# EAGLE board untitled (EAGLE 7.2.0)
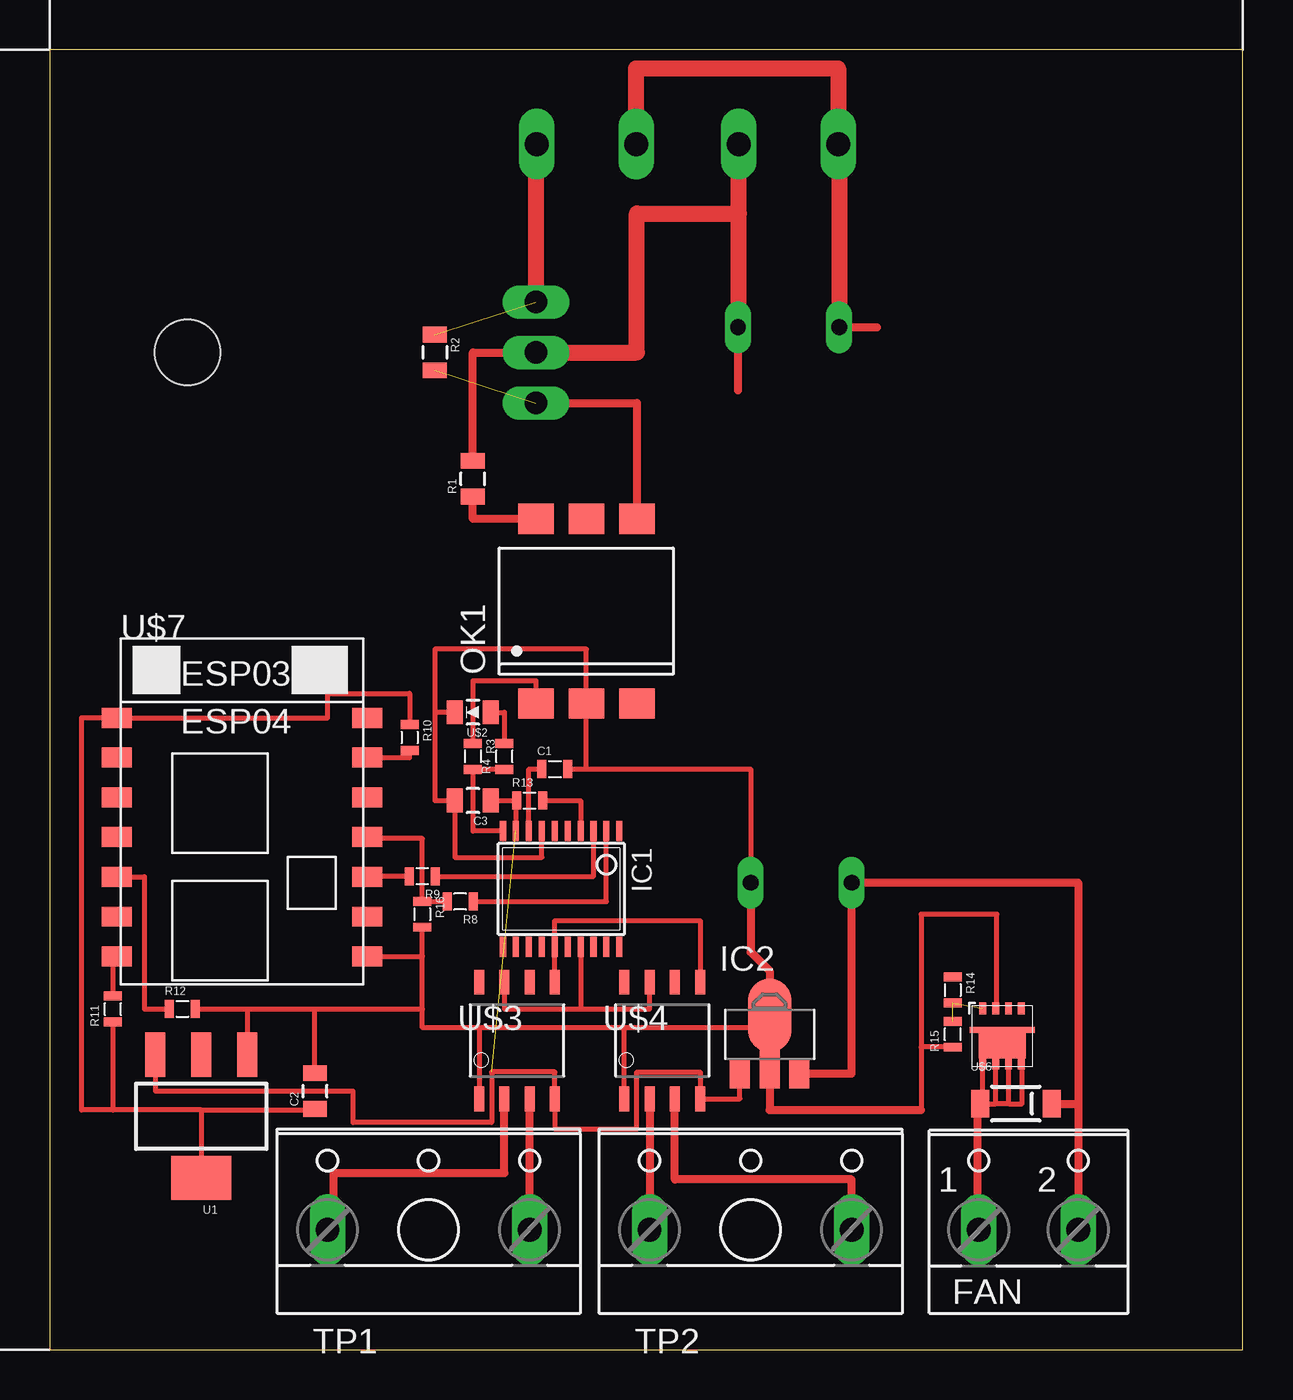
[diagram p0: board, top side]
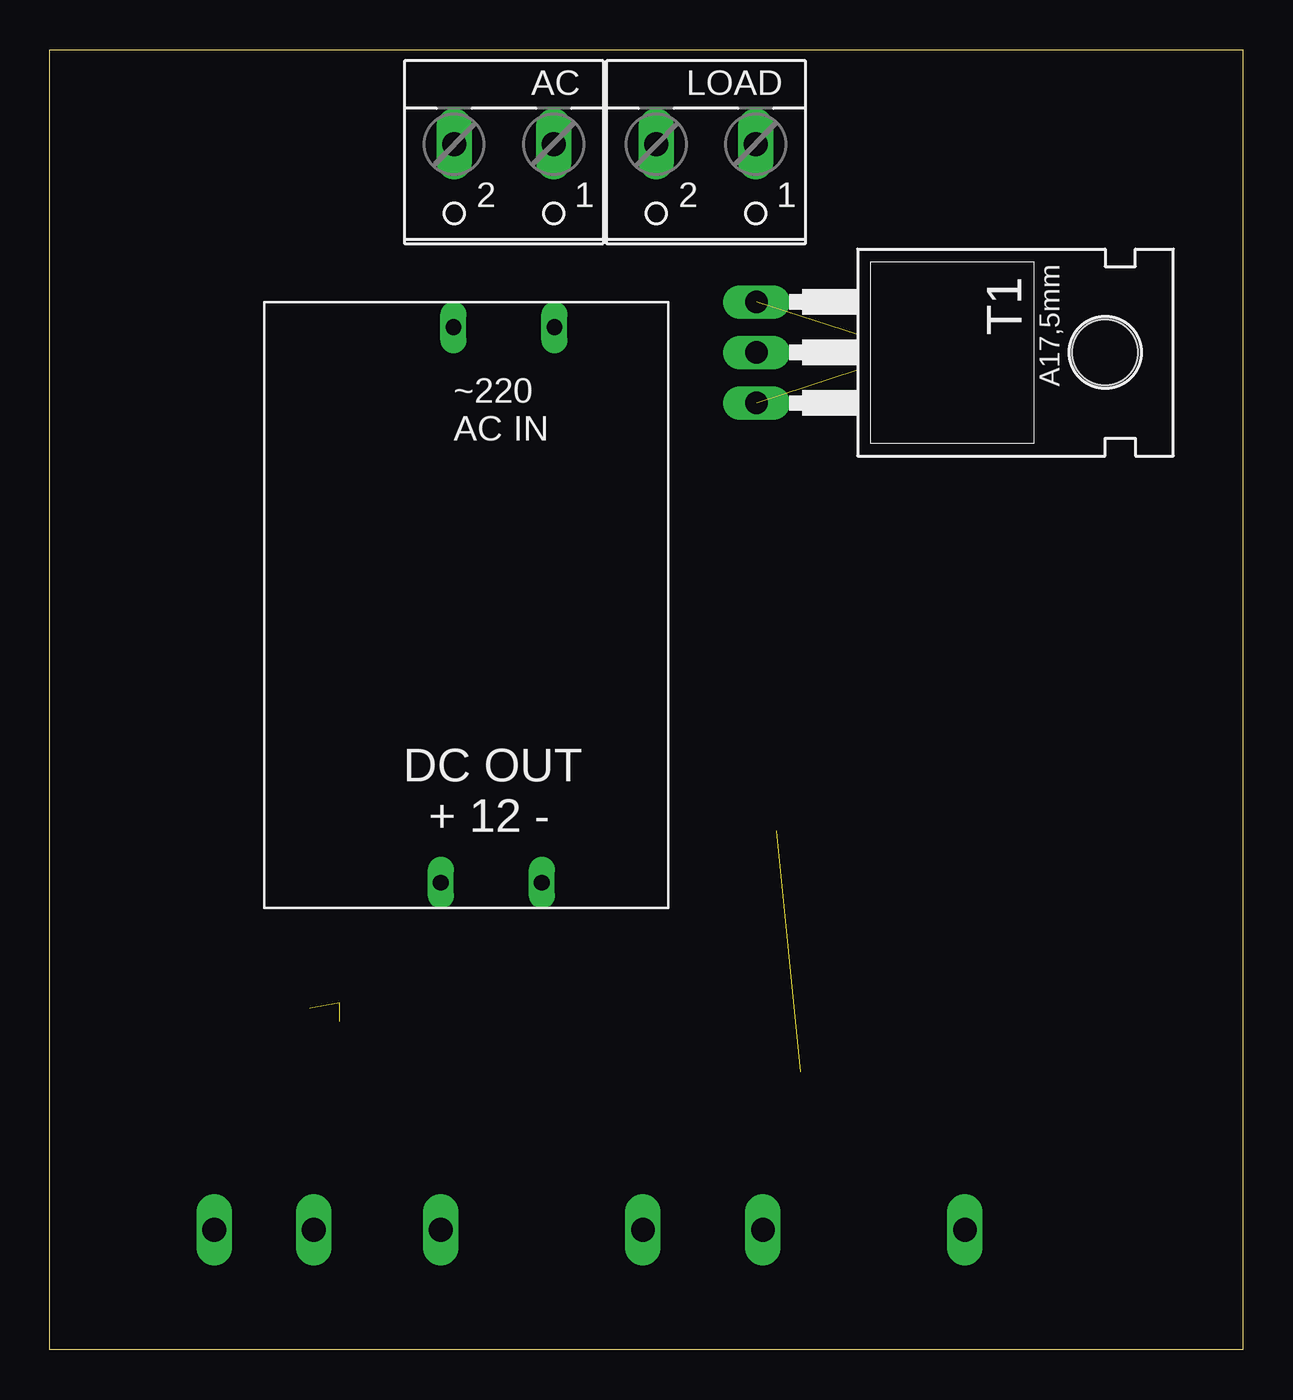
[diagram p1: board, bottom side, seen from below]

Size 59.99 x 65.39 mm. Coordinates in mm from the lower left corner, seen from the top.
Outline: 0,0 59.99,0 59.99,65.39 0,65.39 0,0
Copper layers (1*16): Top 0.035mm / dielectric 1.5mm / Bottom 0.035mm
Design rules "default": minimum track width 0.2mm, minimum drill 0.2mm, track to track 0.2mm, track to pad 0.2mm, pad to pad 0.2mm, via to via 0.2mm, smd to smd 0.2mm, copper to edge 0.2mm, drill to drill 0.2mm, minimum pad ring 10mil, minimum via ring 8mil, stop-mask expansion 4mil, vias tented up to drill 0mil, thermal gap 10mil

## Footprints (pad centres in the part's own frame; a part is rotated, then mirrored left to right if it is on the bottom)
W237-102 = drill 1.194 long: 1 -2.5,-1.27; 2 2.5,-1.27
C0603 = smd 0.45 x 0.9: 1 -0.65,0; 2 0.65,0
C0805 = smd 0.8 x 1.2: 1 -0.9,0; 2 0.9,0
TSSOP20 = smd 0.305 x 0.991: 1 -2.925,-2.918; 2 -2.275,-2.918; 3 -1.625,-2.918; 4 -0.975,-2.918; 5 -0.325,-2.918; 6 0.325,-2.918; 7 0.975,-2.918; 8 1.625,-2.918; 9 2.275,-2.918; 10 2.925,-2.918; 11 2.925,2.918; 12 2.275,2.918; 13 1.625,2.918; 14 0.975,2.918; 15 0.325,2.918; 16 -0.325,2.918; 17 -0.975,2.918; 18 -1.625,2.918; 19 -2.275,2.918; 20 -2.925,2.918
SOT89 = smd 1 x 1.5: 1 -1.499,-1.981; 3 1.499,-1.981 | smd 1 x 2: 2 0,-1.727 | smd 2.2 x 3.7: 2@1 0,0.94
DIL6-SMD = smd 1.78 x 1.52: 1 -2.54,-4.645; 2 0,-4.645; 3 2.54,-4.645; 4 2.54,4.645; 5 0,4.645; 6 -2.54,4.645
R0805 = smd 0.8 x 1.2: 1 -0.9,0; 2 0.9,0
0603 = smd 0.45 x 0.9: 1 -0.65,0; 2 0.65,0
TO220BH = drill 1.118 long: G 2.54,-6.35; T1 -2.54,-6.35; T2 0,-6.35 | hole 3.302: 0,11.176
W237-2N = drill 1.194 long: 1 -5.08,-0.635; 2 5.08,-0.635
SOT223 = smd 1 x 2.235: 1 -2.311,-3.099; 2 0,-3.099; 3 2.311,-3.099 | smd 3 x 2.2: 4 0,3.099
0805-LED = smd 0.8 x 1.2: A -0.9,0; C 0.9,0
SO08 = smd 0.5 x 1.25: 1 -1.905,-2.934; 2 -0.635,-2.934; 3 0.635,-2.934; 4 1.905,-2.934; 5 1.905,2.934; 6 0.635,2.934; 7 -0.635,2.934; 8 -1.905,2.934
DFN3X3 = smd 1.6 x 2.375: D -0.425,0.05 | smd 0.3 x 0.8: D:1 0.225,1.275; D:2 0.225,-1.175 | smd 0.6 x 0.35: D:3 -1.461,-0.916; D:4 -1.461,-0.266; D:5 -1.461,0.384; D:6 -1.461,1.034; G 1.289,1.034; S:1 1.289,0.384; S:2 1.289,-0.266; S:3 1.289,-0.916
SOD80C = smd 0.9 x 1.4: A -1.8,0; C 1.8,0
ESP-03 = smd 1.5 x 1: ANT 7.4,4.8; CH_PD 7.4,2.8; GND 7.4,-7.2; GPIO0 -5.2,-7.2; GPIO2 -5.2,-5.2; GPIO12 -5.2,0.8; GPIO13 -5.2,-1.2; GPIO14 -5.2,2.8; GPIO15 -5.2,-3.2; GPIO18 7.4,0.8; NC 7.4,-5.2; URXD 7.4,-1.2; UTXD 7.4,-3.2; VCC -5.2,4.8
ACDC12(1) = drill 0.8 long: +12 8.89,1.27; GND 13.97,1.27; N 9.525,29.21; P 14.605,29.21

## Placement (x,y rotation side)
AC  [W237-102]  37.15,59.37 180 bottom
C1  [C0603]  25.4,29.21 0 top
C2  [C0805]  13.34,13.02 90 top
C3  [C0805]  21.27,27.62 180 top
FAN  [W237-102]  49.21,7.3 0 top
IC1  STM8S003F3  [TSSOP20]  25.72,23.18 180 top
IC2  78L05F  [SOT89]  36.2,15.88 0 top
LOAD  [W237-102]  26.99,59.37 180 bottom
OK1  MOC3043S  [DIL6-SMD]  26.99,37.15 0 top
R1  360  [R0805]  21.27,43.81 90 top
R2  360  [R0805]  19.37,50.16 270 top
R3  1k  [0603]  21.27,29.84 270 top
R4  1k  [0603]  22.86,29.84 90 top
R8  [0603]  20.64,22.54 180 top
R9  [0603]  18.73,23.81 180 top
R10  [0603]  18.1,30.8 270 top
R11  [0603]  3.17,17.14 90 top
R12  [0603]  6.67,17.14 0 top
R13  [0603]  24.13,27.62 0 top
R14  [0603]  45.4,18.1 270 top
R15  [0603]  45.4,15.88 90 top
R16  [0603]  18.73,21.91 270 top
T1  BT138-H  [TO220BH]  18.1,50.16 270 bottom
TP1  [W237-2N]  19.05,6.67 0 top
TP2  [W237-2N]  35.24,6.67 0 top
U1  [SOT223]  7.62,11.75 180 top
U$2  LED0805  [0805-LED]  21.27,32.07 180 top
U$3  MAX6675  [SO08]  23.5,15.56 0 top
U$4  MAX6675  [SO08]  30.8,15.56 0 top
U$5  AON7200  [DFN3X3]  47.94,15.88 90 top
U$6  PMLL4150  [SOD80C]  48.58,12.38 0 top
U$7  ESP8266  [ESP-03]  8.57,26.99 0 top
U$8  AC-DC  [ACDC12(1)]  49.21,22.23 0 bottom

## Library data of the parts
AC FAN LOAD = con-wago-500; MPN: 237-102; OC_FARNELL: unknown; OC_NEWARK: 70K9898
C1-C3 IC1 R1-R4 R8-R16 U$2-U$5 U$7 U$8 = CasaLibrary
IC2 = linear
OK1 = optocoupler; MF: FAIRCHILD SEMICONDUCTOR; MPN: MOC3043SM; OC_FARNELL: 1505441; OC_NEWARK: 78K6091
T1 = triac
TP1 TP2 = con-wago-508; OC_FARNELL: unknown; OC_NEWARK: unknown
U1 = CasaLibrary; PROD_ID: VREG-08170
U$6 = DIODE

## Nets
12V: FAN.2 IC2.3 U$6.C U$8.+12
+3V3: C2.1 R10.1 R11.1 U1.4 U$7.VCC
+5V: C3.1 IC1.9 IC2.1 R13.1 U1.3 U$3.4 U$4.4
DIMM_IN: IC1.10 R3.2 R4.1
ESP8266_!RST: R10.2 U$7.CH_PD
ESP8266_FLASH: R11.2 U$7.GPIO0
ESP8266_RX: IC1.2 R8.1
ESP8266_TX: IC1.3 R9.1
FAN_PWM: R14.1
GND: C1.2 C2.2 C3.2 IC1.7 IC2.2 IC2.2@1 OK1.2 R12.2 R15.1 R16.2 U1.1 U$2.C U$3.1 U$4.1 U$5.S:1 U$5.S:2 U$5.S:3 U$7.GND U$8.GND
MAX7765(1)_!CS: U$3.6
MAX7765(2)_!CS: U$4.6
MAX7765_CLK: IC1.15 U$3.5 U$4.5
MAX7765_OUT: IC1.17 U$3.7 U$4.7
N$1: TP1.2 U$3.3
N$2: OK1.1 R3.1
N$3: R4.2 U$2.A
N$7: OK1.4 R2.2 T1.G
N$8: OK1.6 R1.1
N$9: AC.1 R1.2 T1.T2 U$8.P
N$10: TP1.1 U$3.2
N$11: AC.2 LOAD.2 U$8.N
N$12: LOAD.1 R2.1 T1.T1
N$14: TP2.2 U$4.3
N$15: TP2.1 U$4.2
N$16: R14.2 R15.2 U$5.G
N$17: U$7.GPIO2
N$18: R8.2 R16.1 U$7.URXD
N$19: R9.2 U$7.UTXD
N$20: R12.1 U$7.GPIO15
N$21: U$7.GPIO13
N$22: U$7.GPIO12
N$23: U$7.GPIO14
N$24: U$7.NC
N$25: U$7.GPIO18
N$26: FAN.1 U$5.D U$5.D:1 U$5.D:2 U$5.D:3 U$5.D:4 U$5.D:5 U$5.D:6 U$6.A
N$27: U$7.ANT
N$28: C1.1 IC1.8
STM8_!RST: IC1.4 R13.2
STM8_SWIM: IC1.18

## Tracks (layer width: path | path; a pad name or v marks a point on that pad's centre or on a via)
12V
  Top 0.406: U$6.C 51.71,12.38 | 51.71,12.38 FAN.2 | IC2.3 40.32,13.89 U$8.+12 51.71,23.5 51.71,12.38
+3V3
  Top 0.254: R10.1 18.1,33.02 13.97,33.02 13.97,31.79 U$7.VCC 1.59,31.79 1.59,12.06 3.17,12.06 | R11.1 3.17,12.06 | 7.62,12.06 U1.4 | 7.62,12.06 3.17,12.06 | 7.62,12.06 13.34,12.06 C2.1
+5V  (1 unrouted)
  Top 0.254: IC2.1 34.7,12.62 U$4.4 32.7,13.97 29.53,13.97 29.53,11.11 25.4,11.11 U$3.4 25.4,13.97 22.23,13.97 22.23,11.43 15.24,11.43 15.24,13.02 5.31,13.02 U1.3 | IC1.9 23.44,27.62 R13.1 C3.1
DIMM_IN
  Top 0.254: IC1.10 21.27,26.09 R3.2 R4.1
ESP8266_!RST
  Top 0.254: U$7.CH_PD 18.1,29.79 R10.2
ESP8266_FLASH
  Top 0.254: U$7.GPIO0 3.17,19.79 R11.2
ESP8266_RX
  Top 0.254: IC1.2 27.99,22.54 R8.1
ESP8266_TX
  Top 0.254: R9.1 27.34,23.81 IC1.3
GND
  Top 0.254: U$7.GND 18.73,19.79 | 18.73,19.79 R16.2 | U$4.1 28.89,16.19 | 28.89,16.19 21.59,16.19 | 21.59,16.19 U$3.1 | 35.88,16.19 28.89,16.19 | 9.93,17.14 13.34,17.14 | 13.34,17.14 18.73,17.14 | 18.73,17.14 18.73,19.79 | 21.59,16.19 18.73,16.19 18.73,17.14 | R15.1 43.81,15.22 | 43.81,15.22 43.81,12.06 | U$5.S:1 47.62,17.16 47.62,21.91 43.81,21.91 43.81,15.22 | 35.24,22.86 35.24,29.21 C1.2 26.99,29.21 OK1.2 26.99,35.24 19.37,35.24 19.37,32.07 | R12.2 9.93,17.14 | 9.93,17.14 U1.1 | C2.2 13.34,17.14 | IC1.7 24.74,24.77 20.37,24.77 C3.2 19.37,27.62 19.37,32.07 | U$2.C 19.37,32.07
  Top 0.406: U$8.GND 35.24,22.86 35.24,20 36.2,19.05 IC2.2@1 | IC2.2@1 36.2,16.51 35.88,16.19 35.88,16.5 IC2.2@1 | IC2.2@1 IC2.2 | 36.2,13.65 IC2.2 | IC2.2 36.2,12.06 43.81,12.06
MAX7765_CLK
  Top 0.254: IC1.15 U$3.5 25.4,21.59 32.7,21.59 U$4.5
MAX7765_OUT
  Top 0.254: U$3.7 22.86,17.14 26.69,17.14 | 26.69,17.14 30.16,17.14 U$4.7 | IC1.17 26.69,17.14
N$1
  Top 0.406: TP1.2 U$3.3
N$2
  Top 0.254: R3.1 21.27,33.66 24.45,33.66 OK1.1
N$3
  Top 0.254: U$2.A 22.86,32.07 R4.2
N$7  (1 unrouted)
  Top 0.406: T1.G 29.53,47.62 OK1.4
N$8
  Top 0.406: OK1.6 21.27,41.79 R1.1
N$9
  Top 0.406: R1.2 21.27,50.16 T1.T2 | 34.61,48.26 U$8.P
  Top 0.813: T1.T2 29.53,50.16 29.53,57.15 34.65,57.15 | 34.65,57.15 AC.1 | U$8.P 34.65,51.44 34.65,57.15
N$10
  Top 0.406: TP1.1 14.29,6.03 14.29,8.89 22.86,8.89 U$3.2
N$11
  Top 0.406: U$8.N 41.59,51.44
  Top 0.813: LOAD.2 29.49,64.45 39.65,64.45 AC.2 39.69,60.64 U$8.N
N$12  (1 unrouted)
  Top 0.813: LOAD.1 24.45,60.64 T1.T1
N$14
  Top 0.406: TP2.2 40.32,8.57 31.43,8.57 U$4.3
N$15
  Top 0.406: U$4.2 TP2.1
N$16  (2 unrouted)
N$18
  Top 0.254: U$7.URXD 15.97,25.72 18.73,25.72 R16.1 19.99,22.56 R8.2
N$19
  Top 0.254: R9.2 15.97,23.81 U$7.UTXD
N$20
  Top 0.254: U$7.GPIO15 4.76,23.79 4.76,17.14 R12.1
N$26
  Top 0.254: 48.9,14.29 48.9,12.38 48.21,12.38 | 48.21,12.38 U$5.D:4 | 48.21,12.38 47.56,12.38 | 47.56,12.38 U$5.D:5 | U$6.A 46.91,12.38 U$5.D:6 | 46.67,12.38 47.56,12.38
  Top 0.406: FAN.1 46.67,6.03 46.67,12.38
N$28
  Top 0.254: IC1.8 24.09,29.21 C1.1
STM8_!RST
  Top 0.254: R13.2 26.69,27.62 IC1.4